# EAGLE board unidimmer01 (EAGLE 4.16)
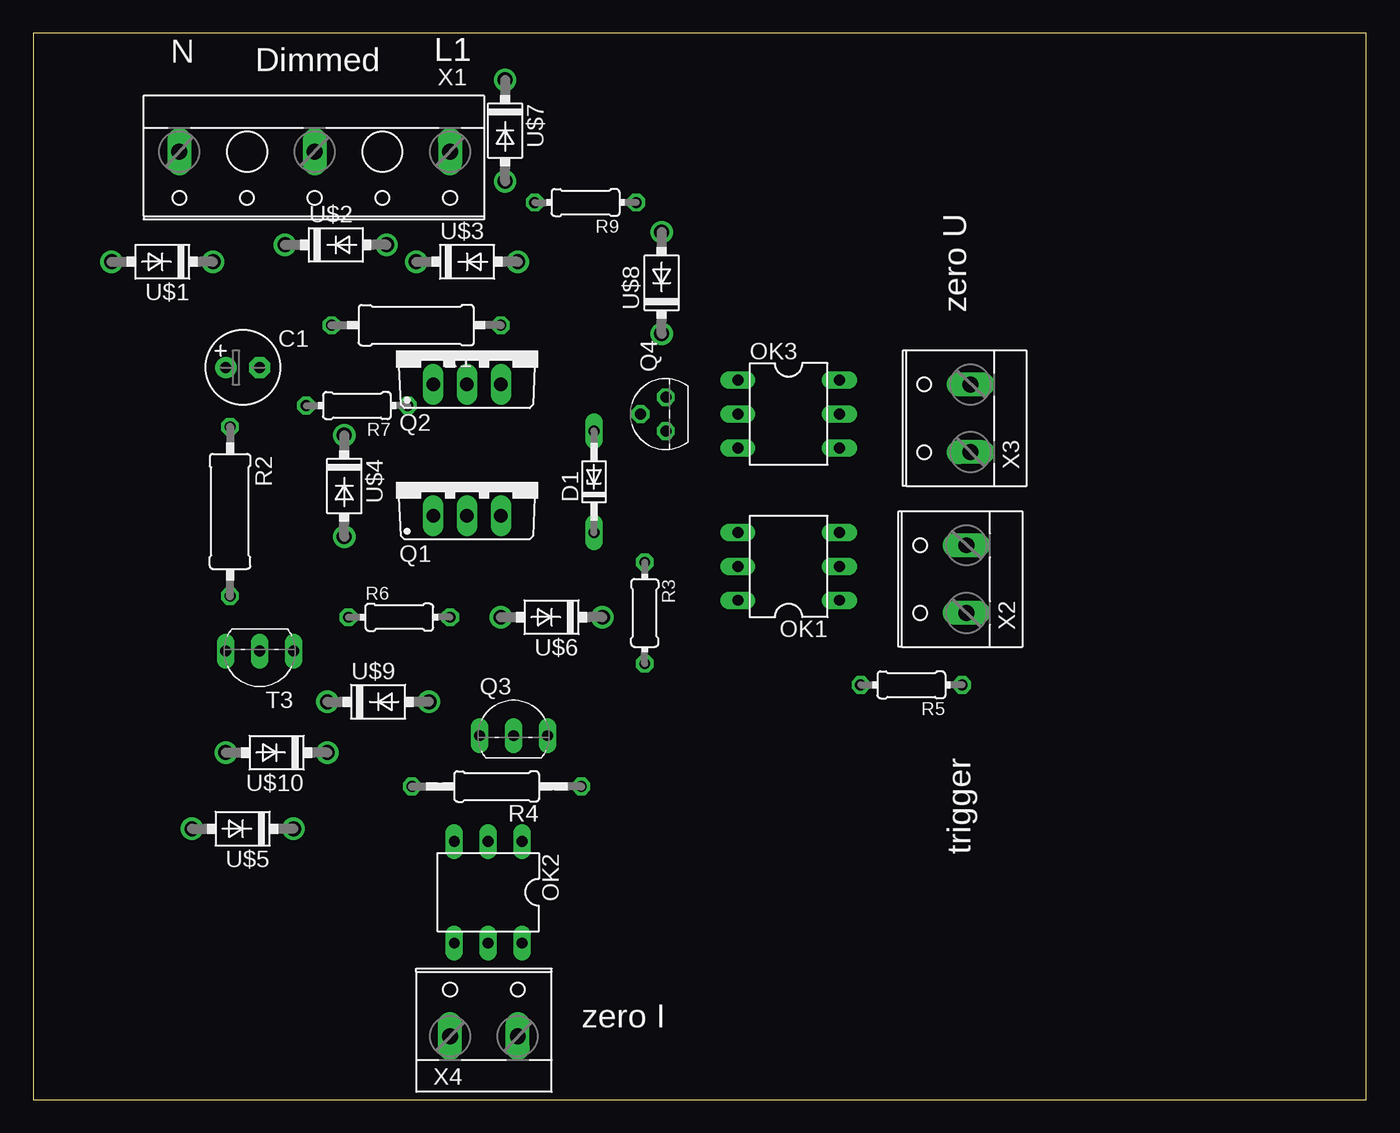
[diagram p0: board, top side]
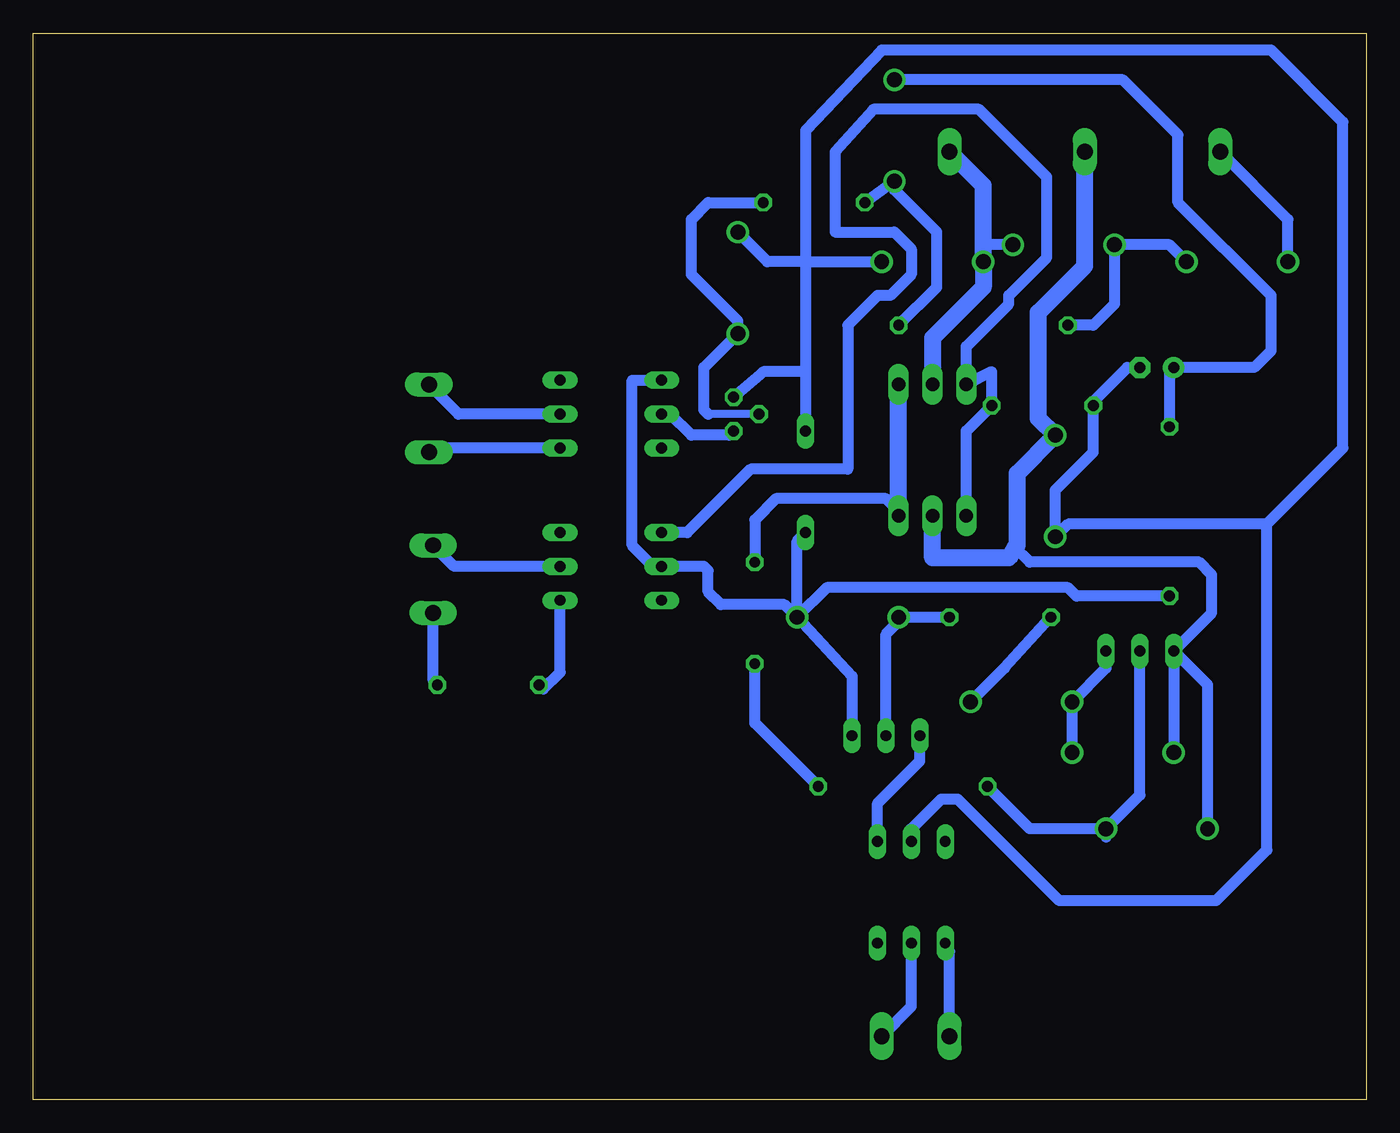
[diagram p1: board, bottom side, seen from below]

Size 100 x 80 mm. Coordinates in mm from the lower left corner, seen from the top.
Outline: 0,0 100,0 100,80 0,80 0,0
Copper layers (1*16): Top 0.035mm / dielectric 1.5mm / Bottom 0.035mm
Design rules "default": minimum track width 10mil, minimum drill 24mil, track to track 8mil, track to pad 8mil, pad to pad 8mil, via to via 8mil, smd to smd 8mil, copper to edge 40mil, drill to drill 8mil, minimum pad ring 10mil, minimum via ring 8mil, stop-mask expansion 4mil, vias tented up to drill 0mil, thermal gap 10mil
bRestrict: area 30.9,52.4 to 31.6,55.2; area 33.5,52.4 to 34.1,55.2; area 30.9,42.2 to 31.6,45.1; area 33.5,42.2 to 34.1,45.4; area 57.3,47.3 to 58.6,56.5; area 57.3,35.9 to 58.6,43.8; area 30,13.3 to 38.9,15.2

## Footprints (pad centres in the part's own frame; a part is rotated, then mirrored left to right if it is on the bottom)
E2,5-6 = drill 0.813 pad 1.6 round: + -1.27,0 | drill 0.813 pad 1.6 octagon: - 1.27,0
DO34Z7 = drill 0.813 long: A 3.81,0; C -3.81,0
DIL06 = drill 0.813 long: 1 -2.54,-3.81; 2 0,-3.81; 3 2.54,-3.81; 4 2.54,3.81; 5 0,3.81; 6 -2.54,3.81
TO220BV = drill 1.016 long: D 0,-2.54; G -2.54,-2.54; S 2.54,-2.54
TO92-EBC = drill 0.813 long: B 0,-1.27; C -2.54,-1.27; E 2.54,-1.27
TO92 = drill 0.813 octagon: 1 1.27,0; 2 0,1.905; 3 -1.27,0
0309/12 = drill 0.813 octagon: 1 -6.35,0; 2 6.35,0
0204/7 = drill 0.813 octagon: 1 -3.81,0; 2 3.81,0
0207/12 = drill 0.813 octagon: 1 -6.35,0; 2 6.35,0
DO41-7 = drill 1.118 round: A 3.81,0; C -3.81,0
W237-3N = drill 1.194 long: 1 -10.16,-0.635; 2 0,-0.635; 3 10.16,-0.635
W237-132 = drill 1.194 long: 1 -2.54,-0.635; 2 2.54,-0.635

## Placement (x,y rotation side)
C1  [E2,5-6]  15.71,54.92 0 top
D1  BZV10  [DO34Z7]  42.06,46.35 90 top
OK1  CNY17  [DIL06]  56.67,40 90 top
OK2  CNY17  [DIL06]  34.12,15.55 180 top
OK3  CNY17  [DIL06]  56.67,51.43 270 top
Q1  IRF740  [TO220BV]  32.54,46.35 0 top
Q2  IRF740  [TO220BV]  32.54,56.19 0 top
Q3  BC557C  [TO92-EBC]  36.03,28.57 0 top
Q4  BC547B  [TO92]  47.46,51.43 90 top
R1  100k  [0309/12]  28.73,58.1 180 top
R2  [0309/12]  14.76,44.13 270 top
R3  560k  [0204/7]  45.87,36.51 270 top
R4  560k  [0207/12]  34.76,23.49 180 top
R5  [0204/7]  65.88,31.11 180 top
R6  3k3  [0204/7]  27.46,36.19 0 top
R7  10k  [0204/7]  24.28,52.07 180 top
R9  56k  [0204/7]  41.43,67.3 180 top
T3  [TO92-EBC]  16.98,32.38 180 top
U$1  1N4007  [DO41-7]  9.68,62.86 180 top
U$2  1N4007  [DO41-7]  22.7,64.13 0 top
U$3  1N4007  [DO41-7]  32.54,62.86 0 top
U$4  1N4007  [DO41-7]  23.33,46.03 270 top
U$5  1N4007  [DO41-7]  15.71,20.31 180 top
U$6  1N4007  [DO41-7]  38.89,36.19 180 top
U$7  1N4007  [DO41-7]  35.39,72.7 270 top
U$8  1N4007  [DO41-7]  47.14,61.27 90 top
U$9  1N4007  [DO41-7]  25.87,29.84 0 top
U$10  1N4007  [DO41-7]  18.25,26.03 180 top
X1  [W237-3N]  21.11,70.48 180 top
X2  [W237-132]  69.37,39.05 90 top
X3  [W237-132]  69.69,51.11 90 top
X4  [W237-132]  33.81,5.39 0 top

## Library data of the parts
C1 R1-R7 R9 = rcl
D1 U$1-U$10 = diode
OK1-OK3 = optocoupler
Q1 Q2 = transistor-power
Q3 = transistor-pnp
Q4 = transistor-npn
T3 = transistor
X1-X4 = con-wago-508

## Nets
N$1: Q1.S Q2.S R3.1
N$2: Q2.D U$2.A U$3.C X1.1
N$3: Q1.D T3.E U$4.C U$5.A U$10.A X1.2
N$4: R3.2 R4.1
N$5: C1.- D1.A OK2.2 Q4.1 R7.2 U$3.A U$4.A U$8.A
N$6: OK1.4 Q1.G Q2.G R7.1
N$7: U$1.A X1.3
N$8: R1.2 U$1.C U$2.C
N$10: D1.C OK1.5 OK3.1 Q3.E R2.2 U$6.C
N$11: R4.2 T3.B U$5.C
N$12: OK2.1 Q3.C
N$13: R6.1 U$9.A
N$14: T3.C U$9.C U$10.C
N$15: C1.+ R2.1 U$7.C
N$16: R1.1 R9.2 U$7.A
N$18: OK1.2 X2.2
N$19: Q3.B R6.2 U$6.A
N$20: R5.1 X2.1
N$21: OK3.5 X3.2
N$22: OK3.4 X3.1
N$23: OK2.5 X4.2
N$24: OK2.4 X4.1
N$25: OK1.1 R5.2
N$27: Q4.2 R9.1 U$8.C
N$28: OK3.2 Q4.3

## Tracks (layer width: path | path; a pad name or v marks a point on that pad's centre or on a via)
N$1
  Bottom 0.813: Q2.S 35.08,53.97 | R3.1 45.87,43.49 44.28,45.08 36.03,45.08 35.08,44.13
  Bottom 1.27: Q1.S 35.08,44.13 Q2.S
N$2
  Bottom 0.813: U$2.A 28.73,64.13 U$3.C
  Bottom 1.27: X1.1 28.73,68.57 U$3.C 28.73,60.96 32.54,57.15 Q2.D
N$3
  Bottom 0.813: U$5.A 11.9,31.11 T3.E | T3.E U$10.A | T3.E 11.58,36.51 11.58,39.37 12.54,40.32 25.23,40.32 26.35,41.43 | 26.35,41.43
  Bottom 1.27: Q1.D 32.54,40.64 26.82,40.64 26.35,41.43 26.19,41.59 26.19,46.98 U$4.C 24.6,51.11 24.6,59.05 21.11,62.54 X1.2
N$4
  Bottom 0.813: R4.1 45.87,28.25 R3.2
N$5
  Bottom 0.813: 42.06,62.86 U$3.A | 42.06,62.86 42.06,54.61 | 42.06,54.61 D1.A | C1.- 17.93,54.92 20.47,52.38 R7.2 20.47,48.57 23.33,45.72 U$4.A 22.38,43.18 7.46,43.18 | 42.06,62.86 42.06,72.7 36.35,78.73 7.14,78.73 1.74,73.34 1.74,48.89 7.46,43.18 | OK2.2 34.12,20.31 31.9,22.54 30.63,22.54 23.01,14.92 11.27,14.92 7.46,18.73 7.46,43.18 | Q4.1 45.24,54.61 42.06,54.61 | U$8.A 44.92,62.86 42.06,62.86
N$6
  Bottom 0.813: Q1.G 30,50.16 R7.1 28.09,54.61 Q2.G 30,56.51 26.82,59.69 26.82,60.32 23.96,63.18 23.96,69.21 29.04,74.29 36.98,74.29 39.84,71.11 39.84,65.08 35.39,65.08 34.12,63.81 34.12,61.91 35.71,60.32 36.66,60.32 38.89,58.1 38.89,47.3 46.19,47.3 50.95,42.54 OK1.4
N$7
  Bottom 0.813: U$1.A 5.87,66.03 X1.3 10.95,71.75
N$8
  Bottom 0.813: U$1.C 14.76,64.13 U$2.C 18.88,59.69 20.47,58.1 R1.2
N$10
  Bottom 0.813: D1.C 42.7,41.91 U$6.C | U$6.C 43.65,37.14 48.41,37.14 49.37,38.1 49.37,39.68 49.68,40 OK1.5 53.49,40 55.08,41.59 55.08,53.97 OK3.1 | Q3.E 38.57,31.74 U$6.C | U$6.C 40.48,38.41 22.38,38.41 21.74,37.78 R2.2
N$11
  Bottom 0.813: T3.B 16.98,22.86 U$5.C | U$5.C 19.52,19.68 | R4.2 25.23,20.31 U$5.C
N$12
  Bottom 0.813: OK2.1 36.66,22.22 33.49,25.39 Q3.C
N$13
  Bottom 0.813: R6.1 27.14,32.38 U$9.A
N$14
  Bottom 0.813: T3.C 19.52,32.38 U$9.C U$10.C
N$15
  Bottom 0.813: C1.+ 14.12,54.92 | R2.1 14.76,54.61 C1.+ | U$7.C 18.25,76.51 14.12,72.38 14.12,67.3 7.14,60.32 7.14,56.19 8.41,54.92 C1.+
N$16
  Bottom 0.813: U$7.A R9.2 | R1.1 32.22,60.96 32.22,65.08 35.39,68.26 U$7.A | 35.39,69.21 U$7.A
N$18
  Bottom 0.813: OK1.2 68.41,40 X2.2
N$19
  Bottom 0.813: U$6.A 35.39,36.19 | U$6.A R6.2 | U$6.A 35.08,35.87 36.03,34.92 Q3.B
N$20
  Bottom 0.813: X2.1 70,31.43 R5.1
N$21
  Bottom 0.813: OK3.5 68.1,51.43 X3.2
N$22
  Bottom 0.813: OK3.4 70,48.89 X3.1
N$23
  Bottom 0.813: X4.2 34.12,6.98 OK2.5
N$24
  Bottom 0.813: OK2.4 31.58,11.43 31.27,11.11 X4.1
N$25
  Bottom 0.813: R5.2 61.75,30.79 60.48,32.06 OK1.1
N$27
  Bottom 0.61: Q4.2 49.37,51.43
  Bottom 0.813: R9.1 49.37,67.3 50.63,66.03 50.63,61.91 47.14,58.41 U$8.C 49.68,54.92 49.68,51.75 49.37,51.43
N$28
  Bottom 0.813: Q4.3 47.78,49.84 50.63,49.84 52.22,51.43 OK3.2

## Text on the board
tPlace: L1 | N | Dimmed | zero U | trigger | zero I